# Altium PCB Z.PcbDoc
Units mm, origin at the board's own origin, x right, y up, seen from the top; angles counter-clockwise.
Board outline 9.5 x 51 mm, 2 copper layers (Top Layer, Bottom Layer); 4 components, 2 nets, 17 pads, 0 vias.
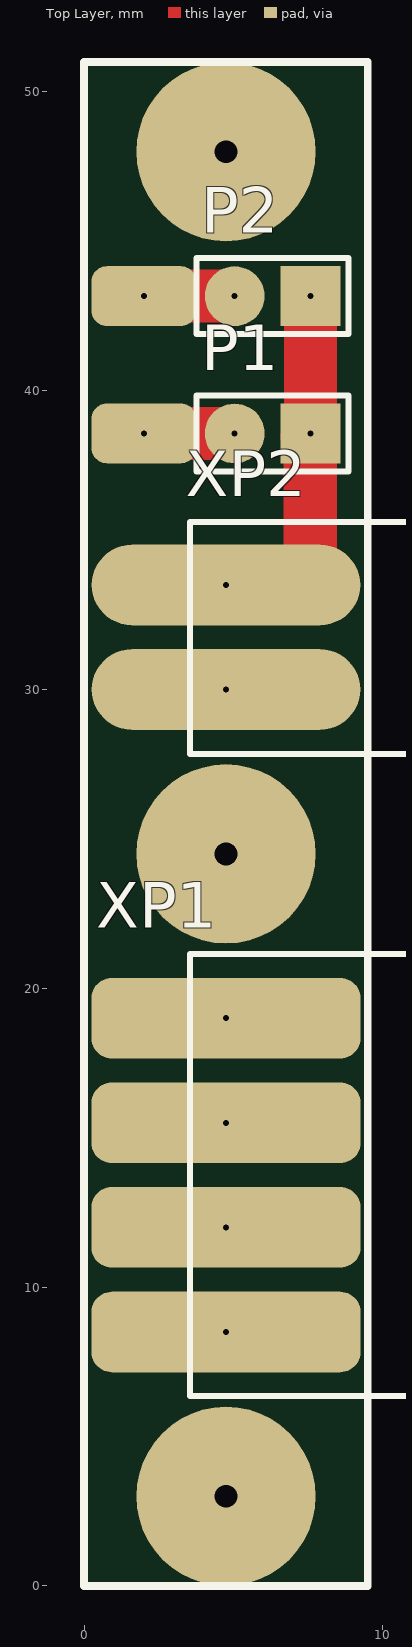
[diagram p0: Top Layer view]
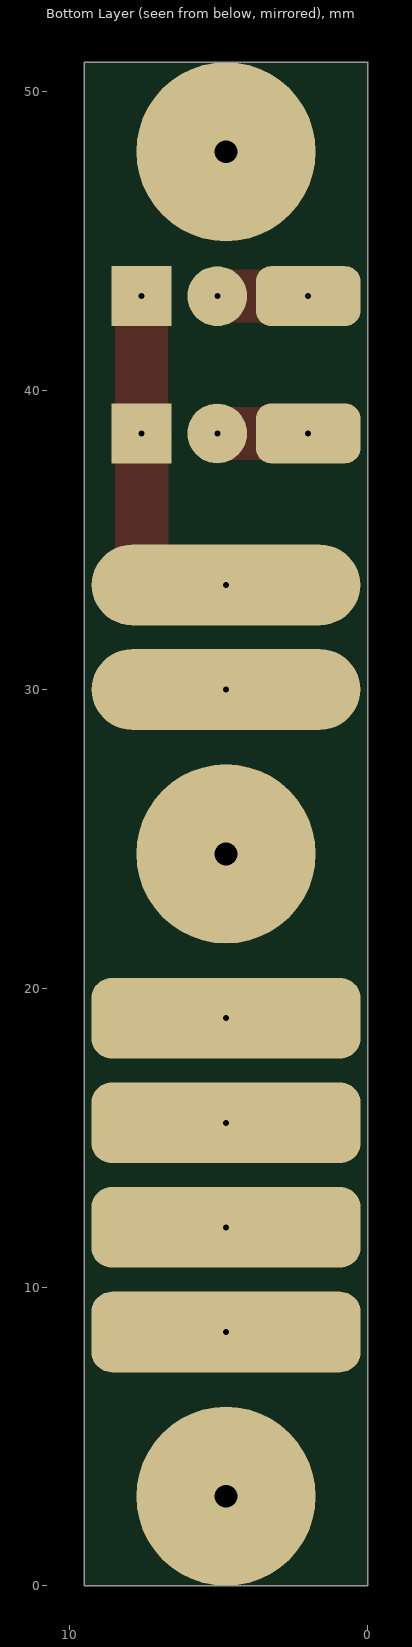
[diagram p1: Bottom Layer view, seen from below]

## Layer stack, top to bottom
Top Solder: solder mask 0.0102, Solder Resist, Dk 3.5
Top Layer: signal copper 0.0356
Dielectric 1: dielectric 0.32, FR-4, Dk 4.8
Bottom Layer: signal copper 0.0356
Bottom Solder: solder mask 0.0102, Solder Resist, Dk 3.5

## Board outline
0,0 0,51 9.5,51 9.5,0

## Design rules (kind name [scope] priority, off if disabled: settings)
Clearance [All] p1: gap=0.254 ignorepadtopadclearanceinfootprint=FALSE except(0: Arc-Hole Track-Hole SMDPad-Hole THPad-Hole Via-Hole Fill-Hole Poly-Hole Region-Hole Text-Hole)
PolygonConnect [All] p1: connectstyle=Relief reliefconductorwidth=0.254 reliefentries=4 polygonreliefangle="90 Angle" airgapwidth=0.254
RoutingVias [All] p1: holewidth=0.711 width=1.27 viastyle="Through Hole" minholewidth=0.711 minwidth=1.27 maxholewidth=0.711 maxwidth=1.27
SolderMaskExpansion [All] p1: expansion=0.102
Width [All] p1: maxlimit=12.7 minlimit=0.254 preferedwidth=0.254 minimp=50.000000 maximp=50.000000 favimp=50.000000
30 further rules are at their usual default settings.

## Components (designator, comment, footprint, x,y, rotation, side; value= is the part's Value field where it differs from the comment)
P1 "Header 2" HDR1X2 7.58,38.572 r180 top
P2 "Header 2" HDR1X2 7.58,43.166 r180 top
XP1 "15EDGRC-3.5-04P" RR_CONN_15EDGRC-3.5-04P 4.75,8.5 r90 top value="Pluggable terminal block; 3.5mm; ways:4; angled 90°; socket; male"
XP2 "15EDGRC-3.5-02P" RR_CONN_15EDGRC-3.5-02P 4.75,30 r90 top value="Pluggable terminal block; 3.5mm; ways:2; angled 90°; socket; male"

## Footprints (in the part's own frame and the unit in brackets; to place one, negate y for a bottom-side part, rotate by r counter-clockwise, add the part's x,y. Pads: shape width x height; smd on the part's side, far side on the other; paste and mask are expansions set on the pad)
HDR1X2 [mm] "Connector; Header; 2 Position"
  rect 2x2 hole 0.2: 1(0,0)
  round 2 hole 0.2: 2(2.54,0)
  silkscreen extent -1.27,-1.27 3.81,1.27
RR_CONN_15EDGRC-3.5-02P [mm]
  oval 2.7x9 hole 0.2: 1(0,0) 2(3.5,0)
  silkscreen extent -2.15,-8 5.6,1.2, body extent -2.2,-8 5.6,1.2, height 7.25
RR_CONN_15EDGRC-3.5-04P [mm]
  rrect50% 2.7x9 hole 0.2: 1(0,0) 2(3.5,0) 3(7,0) 4(10.5,0)
  silkscreen extent -2.15,-8 12.65,1.2, body extent -2.2,-8 12.6,1.2, height 7.25

## Part data
P1 P2: "Header, 2-Pin", LatestRevisionDate=17-Jul-2002, LatestRevisionNote="Re-released for DXP Platform.", Publisher="Altium Limited"
XP1: "CONN 15EDGRC-3.5-04P R-HEADER", Manufacturer="DEGSON ELECTRONICS", Package="4x3.5MM pitch", Cost=0,32, Order Number=15EDGRC-3.5-04P-14-00A(H)
XP2: "CONN 15EDGRC-3.5-02P R-HEADER", Manufacturer="DEGSON ELECTRONICS", Package="2x3.5MM pitch", Cost=0,32, Order Number=15EDGRC-3.5-02P-14-00A(H)

## Free pads (board coordinates)
  round 6 hole 0.762: 1(4.75,3) 1(4.75,24.5) 1(4.75,48) 1(67.056,110.363) 1(133.096,113.665)
  rrect50% 3.5x2 hole 0.2: 2(2,43.166) 3(2,38.572)

## Nets (pads, with @x,y where several pads share a name; then routed paths per layer and width w, separated by ;. In a path a pad name is that pad's centre, name@x,y a point inside that pad or via, vN(x,y) a via of type N, cw(c..) or ccw(c..) an arc to the next point about the centre after c; other vN are vias at no path point)
12V: P1.1 P2.1 XP2.2 | length 12.2
  Top Layer w1.778: XP2.2 7.043,33.5 XP2.2@7.469,33.926 ; P1.1@7.469,38.461 P1.1 ; XP2.2@7.571,33.926 P1.1@7.571,38.055 ; P1.1@7.58,38.166 P2.1
GND: XP2.1
pads on no net: P1.2 P2.2 XP1.1 XP1.2 XP1.3 XP1.4
copper on no net: | length 6.1
  Top Layer w1.778: 2,38.572 5.04,38.572 ; 2,43.166 5.04,43.166

## Silkscreen, mask and mechanical layers (free items; w line width, h text height)
Top Overlay:
  lines w0.254: 78.613,114.046 106.68,114.046 ; 0,0 0,51 9.5,51 9.5,0 0,0